# EAGLE board openSX70-dongle-USB-V1-1 (EAGLE 9.2.0)
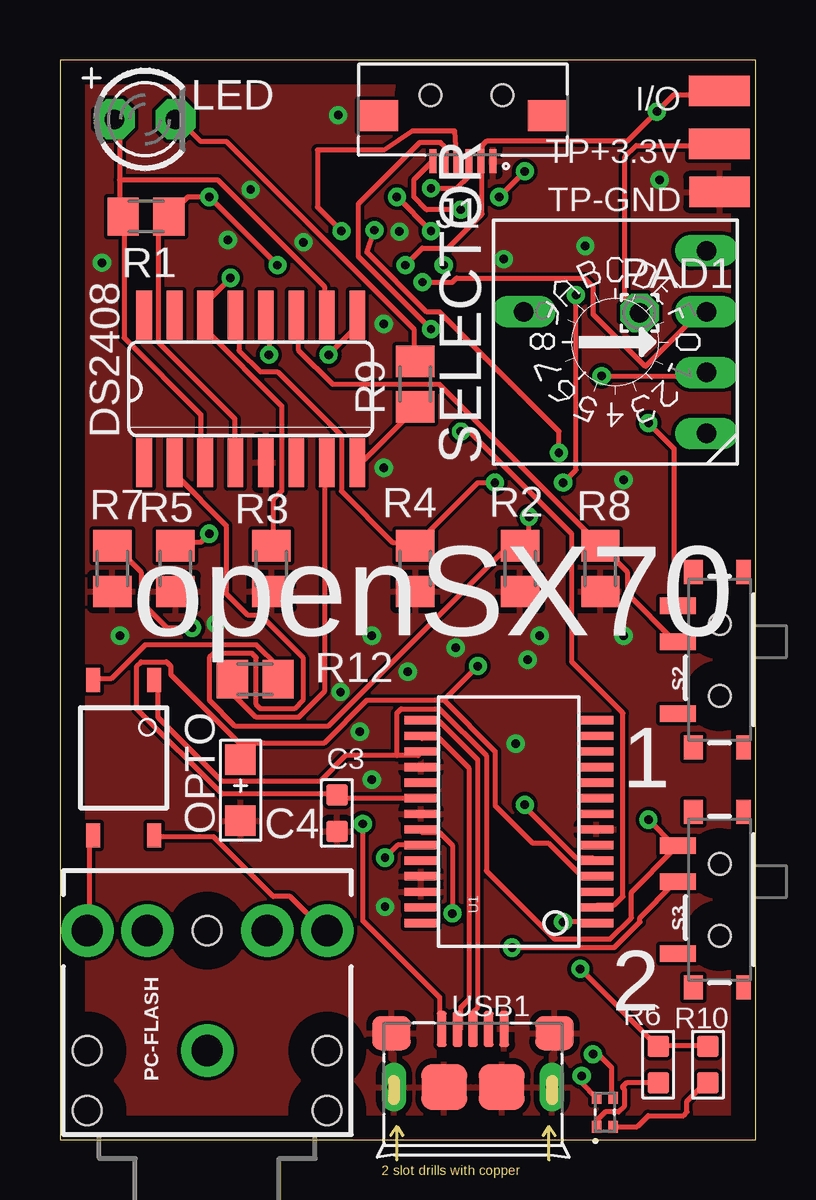
[diagram p0: board, top side]
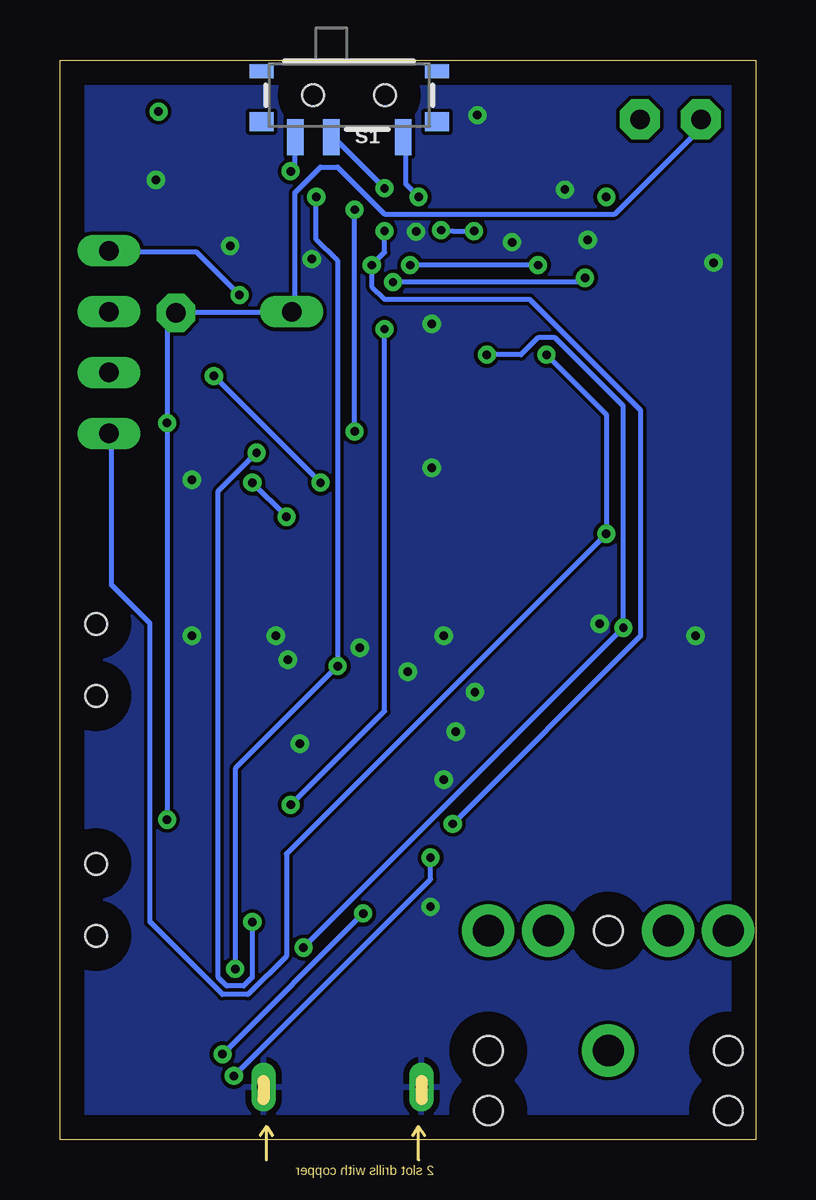
[diagram p1: board, bottom side, seen from below]

Size 29 x 45 mm. Coordinates in mm from the lower left corner, seen from the top.
Outline: 0,0 29,0 29,45 0,45 0,0
Copper layers (1*16): Top 0.035mm / dielectric 1.5mm / Bottom 0.035mm
Design rules "default": minimum track width 6mil, minimum drill 0.35mm, track to track 6mil, track to pad 6mil, pad to pad 6mil, via to via 6mil, smd to smd 6mil, copper to edge 40mil, drill to drill 6mil, minimum pad ring 10mil, minimum via ring 8mil, stop-mask expansion 4mil, vias tented up to drill 0mil, thermal gap 10mil
Net classes: 0 GND: width 0.203 mm; 1 power: width 0.203 mm; 2 2.8V: width 0.203 mm

## Footprints (pad centres in the part's own frame; a part is rotated, then mirrored left to right if it is on the bottom)
C0603 = smd 0.889 x 0.889: 1 0,0.762; 2 0,-0.762
AVX-A = smd 1.27 x 1.27: + -1.27,0; - 1.27,0
SO16 = smd 0.66 x 2.032: 1 -4.445,-3.073; 2 -3.175,-3.073; 3 -1.905,-3.073; 4 -0.635,-3.073; 5 0.635,-3.073; 6 1.905,-3.073; 7 3.175,-3.073; 8 4.445,-3.073; 9 4.445,3.073; 10 3.175,3.073; 11 1.905,3.073; 12 0.635,3.073; 13 -0.635,3.073; 14 -1.905,3.073; 15 -3.175,3.073; 16 -4.445,3.073
SMD1,27-2,54 = smd 1.27 x 2.54: 1 0,0
687106183722 = smd 0.3 x 1: 1 -1.25,1.9; 2 -0.75,1.9; 3 -0.25,1.9; 4 0.25,1.9; 5 0.75,1.9; 6 1.25,1.9 | smd 1.65 x 1.3: Z1 -3.525,0; Z2 3.525,0
LED3MM = drill 0.813 pad 1.676 octagon: A -1.27,0; K 1.27,0
SO-4 = smd 1 x 0.6: 1 -3.24,0.635; 2 -3.24,-1.905; 3 3.24,-1.905; 4 3.24,0.635
1,6/0,8 = drill 0.813 pad 1.6 octagon: 1 0,0
AUDIO-JACK = drill 1.3 pad 2.184: RING 5,5; RSH 5,2.5; SLEEVE 0,0; TIP 5,-5; TSH 5,-2.5 | hole 1.2: 0,5; -2.5,5; -2.5,-5; 0,-5; 5,0
M0805 = smd 1.3 x 1.6: 1 -0.95,0; 2 0.95,0
R0603 = smd 0.889 x 0.889: 1 0,0.762; 2 0,-0.762
SWITCH_SPST_SMD_A = smd 0.7 x 1.5: 1 -2.25,-1.75; 2 -0.75,-1.75; 3 2.25,-1.75 | smd 1 x 0.6: GND1 -3.65,1; GND3 3.65,1 | smd 1 x 0.8: GND2 -3.65,-1.1; GND4 3.65,-1.1 | hole 0.9: -1.5,0; 1.5,0
SW-C16 = drill 0.813 long: 1 -3.81,-3.81; 2 -1.27,-3.81; 4 1.27,-3.81; 8 3.81,-3.81; C 1.27,3.81
SSOP28DB = smd 0.348 x 1.397: 1 -4.225,-3.656; 2 -3.575,-3.656; 3 -2.925,-3.656; 4 -2.275,-3.656; 5 -1.625,-3.656; 6 -0.975,-3.656; 7 -0.325,-3.656; 8 0.325,-3.656; 9 0.975,-3.656; 10 1.625,-3.656; 11 2.275,-3.656; 12 2.925,-3.656; 13 3.575,-3.656; 14 4.225,-3.656; 15 4.225,3.656; 16 3.575,3.656; 17 2.925,3.656; 18 2.275,3.656; 19 1.625,3.656; 20 0.975,3.656; 21 0.325,3.656; 22 -0.325,3.656; 23 -0.975,3.656; 24 -1.625,3.656; 25 -2.275,3.656; 26 -2.925,3.656; 27 -3.575,3.656; 28 -4.225,3.656
LED_APHB1608SYKSURKC = smd 0.5 x 0.4: 1 -0.6,0.35; 2 0.6,0.35; 3 -0.6,-0.35; 4 0.6,-0.35
MICRO-USB5+6P-SMD-0.65-B = smd 0.4 x 1.5: 1 -1.3,-0.25; 2 -0.65,-0.25; 3 0,-0.25; 4 0.65,-0.25; 5 1.3,-0.25 | smd 1.6 x 1.4: S1 -3.4,-0.427; S6 3.4,-0.427 | drill 0.508 pad 1.016 long: S2 -3.3,-2.675; S5 3.3,-2.675 | smd 1.9 x 1.9: S3 -1.2,-2.675; S4 1.2,-2.675

## Placement (x,y rotation side)
C3  100nf  [C0603]  11.55,13.61 0 top
C4  10uf  [AVX-A]  7.53,14.56 270 top
DS2408  DS2408  [SO16]  7.95,31.29 0 top
I/O  [SMD1,27-2,54]  27.48,43.7 90 top
J1  687106183722  [687106183722]  16.8,42.68 180 top
LED  [LED3MM]  3.55,42.53 0 top
OPTO  TLP127  [SO-4]  3.29,15.91 270 top
PAD1  WIREPAD1,6/0,8  [1,6/0,8]  24.16,34.46 0 top
PC-FLASH  AUDIO_JACK_3.5MM_PTH  [AUDIO-JACK]  6.14,3.71 90 top
R1  4K7  [M0805]  3.59,38.47 180 top
R2  100K  [M0805]  19.18,23.8 270 top
R3  100K  [M0805]  8.82,23.8 90 top
R4  100K  [M0805]  14.82,23.8 90 top
R5  100K  [M0805]  4.82,23.8 90 top
R6  1K  [R0603]  24.94,3.12 180 top
R7  100K  [M0805]  2.18,23.8 270 top
R8  100K  [M0805]  22.53,23.8 270 top
R9  220R  [M0805]  14.82,31.49 90 top
R10  1K  [R0603]  27.02,3.12 180 top
R12  220R  [M0805]  8.14,19.18 0 top
S1  [SWITCH_SPST_SMD_A]  16.94,43.53 0 bottom
S2  [SWITCH_SPST_SMD_A]  27.5,20 270 top
S3  [SWITCH_SPST_SMD_A]  27.5,10 270 top
SELECTOR  [SW-C16]  23.15,33.24 90 top
TP+3.3V  [SMD1,27-2,54]  27.48,41.51 90 top
TP-GND  [SMD1,27-2,54]  27.5,39.5 90 top
U1  FT232RLSSOP  [SSOP28DB]  18.71,13.25 90 top
U$1  DUAL-LED-0603-BIS  [LED_APHB1608SYKSURKC]  22.72,1.14 90 top
USB1  10118193-0001LF  [MICRO-USB5+6P-SMD-0.65-B]  17.22,4.86 0 top

## Library data of the parts
C3 = openSX70_PATHFINDER_V5.5-SEEED_20180522; MPN: CC0603KRX7R9BB104
C4 = Seeed-Capacitor-2016; MPN: TAJA106K016RNJ
DS2408 = DS2408-joaco
I/O PAD1 TP+3.3V TP-GND = wirepad
J1 = openSX70_PATHFINDER_V5.5-SEEED_20180522; AVAILABILITY: Good; DESCRIPTION: CONN FFC BTM 6POS 0.5MM SMD R/A; MF: Wurth Electronics; MP: 687106183722; PACKAGE: None; PRICE: 1.21 USD
LED = adafruit
OPTO = openSX70
PC-FLASH = SparkFun-Connectors; PROD_ID: CONN-08774; SF_ID: PRT-08032
R1-R5 R7-R9 R12 = rcl; SPICEPREFIX: R
R6 R10 = openSX70_PATHFINDER_V5.5-SEEED_20180522; MPN: RC0603FR-071KL
S1-S3 = SparkFun-Switches; PROD_ID: SWCH-10651; SF_SKU: COM-10860
SELECTOR = special
U1 = SparkFun
U$1 = _openSX70
USB1 = Seeed-Connector -2016; MPN: 10118193-0001LF

## Nets
1W: DS2408.4 I/O.1 J1.2 R1.1
3V3OUT: DS2408.3 DS2408.10 LED.A OPTO.1 PAD1.1 R1.2 S2.1 S3.1 SELECTOR.C TP+3.3V.1 U1.17
5V: C3.1 C4.+ R6.2 R10.2 S1.1 U1.4 U1.20
5V-J1: J1.3 S1.2
CTS: U1.11
DTR: J1.6 U1.2
GND: C3.2 C4.- DS2408.5 J1.1 R2.2 R3.1 R4.1 R5.1 R7.2 R8.2 TP-GND.1 U1.7 U1.18 U1.21 U1.25 U1.26 USB1.5 USB1.S1 USB1.S2 USB1.S3 USB1.S4 USB1.S5 USB1.S6
N$2: LED.K R9.2
N$3: DS2408.2 R2.1 SELECTOR.8
N$4: DS2408.14 R3.2 SELECTOR.4
N$5: DS2408.13 R4.2 SELECTOR.2
N$6: DS2408.11 R8.1 S2.2
N$7: DS2408.9 R7.1 S3.2
N$8: DS2408.8 R9.1
N$9: R6.1 U$1.1
N$10: OPTO.2 R12.2
N$11: DS2408.7 R12.1
N$12: OPTO.4 PC-FLASH.TIP
N$13: DS2408.12 R5.2 SELECTOR.1
N$14: R10.1 U$1.3
N$15: OPTO.3 PC-FLASH.RING
N$16: U1.16 USB1.2
RXI: J1.5 U1.5
RXLED: U1.22 U$1.4
TXLED: U1.23 U$1.2
TXO: J1.4 U1.1
USB_D+: U1.15 USB1.3
VCC-USB: S1.3 USB1.1

## Tracks (layer width: path | path; a pad name or v marks a point on that pad's centre or on a via)
1W  (via drill 0.35)
  Top 0.203: DS2408.4 7.29,28.27 7.29,30.05 4.09,33.25 4.09,38.05 4.45,38.41 R1.1 4.62,38.58 5.33,39.29 v6.22,39.29 v9.07,36.45 | I/O.1 27.38,43.56 25.6,43.56 v24.89,42.85 23.65,41.6 17.78,41.6 17.6,41.43 17.6,40.89 J1.2 17.6,40.72 17.6,38.58 16.18,37.16 15.11,37.16 v14.4,36.45
  Bottom 0.203: v9.07,36.45 v14.4,36.45
3V3OUT  (via drill 0.35)
  Top 0.203: 14.05,16 14.94,16 U1.17 | 14.05,16 11.91,16 10.85,14.94 6.76,14.94 4.09,17.6 4.09,19.02 OPTO.1 | 14.05,16 14.05,17.78 14.22,17.96 15.82,17.96 17.78,16 17.78,11.2 20.62,8.36 22.94,8.36 23.82,9.25 23.82,10.31 25.6,12.09 S3.1 25.6,12.27 v24.54,13.34 | 2.49,40.01 2.49,42.32 2.31,42.49 LED.A | 2.49,40.01 2.49,38.58 R1.2 2.67,38.41 2.67,33.43 5.87,30.23 5.87,28.27 DS2408.3 | 2.49,40.01 6.58,40.01 11.02,35.56 11.02,34.49 DS2408.10 | v24.54,29.87 25.6,28.8 25.6,22.4 S2.1 | PAD1.1 23.54,35.08 23.54,40.94 24.03,41.43 27.38,41.43 TP+3.3V.1
  Bottom 0.203: LED.A 2.31,42.49 2.31,42.14 5.87,38.58 15.47,38.58 17.42,40.54 18.14,40.54 19.2,39.47 19.2,34.67 SELECTOR.C 19.38,34.49 24.16,34.49 PAD1.1 24.54,34.21 v24.54,29.87 v24.54,13.34
5V  (via drill 0.35)
  Top 0.203: R10.2 26.85,3.91 25.07,3.91 R6.2 24.89,3.91 v21.69,7.11 | U1.20 14.94,14.22 11.56,14.22 C3.1 11.38,14.4 6.76,14.4 3.2,17.96 3.2,19.74 3.38,19.91 4.45,19.91 4.62,19.74 4.62,19.38 7.47,16.54 | 7.47,16.54 7.47,16 C4.+ | 16,18.31 18.14,16.18 18.14,13.93 19.71,12.36 20.36,12.36 21.69,11.02 22.23,11.02 U1.4 | 16,18.31 12.8,18.31 11.02,16.54 7.47,16.54 | 16,18.31 v17.42,19.74 | v18.31,39.29 v19.38,40.36
  Bottom 0.203: v21.69,7.11 21.69,15.47 v17.42,19.74 17.42,36.63 18.31,37.52 v18.31,39.29 | v19.38,40.36 19.2,40.54 19.2,41.6 S1.1
5V-J1  (via drill 0.35)
  Top 0.203: v15.47,39.65 16.54,39.65 17.07,40.18 17.07,40.72 J1.3
  Bottom 0.203: v15.47,39.65 17.6,41.78 S1.2
DTR  (via drill 0.35)
  Top 0.203: v16.71,29.52 17.07,29.52 21.34,25.25 21.34,19.91 23.47,17.78 23.47,10.13 23.11,9.78 22.4,9.78 U1.2 | v16.71,38.76 15.29,38.76 14.76,39.29 14.76,40.01 15.47,40.72 J1.6
  Bottom 0.203: v16.71,29.52 v16.71,38.76
GND  (via drill 0.35)
  other vias: 25,40 14.15,37.85 10.15,37.4 13.5,34 13.5,28 7,37.5 23.5,27.5 12.5,17 13,21 20,21 14.5,19.5 6.5,21.5 2.5,21 16.5,20.5 19,16.5 13,15 19.5,20 11.7,18.65 11.6,42.7 18.5,36.7 1.75,36.55 13.55,9.7 23.5,21 21.9,37.25 7.95,39.6
  pour Top: 0,45 29,45 29,0 0,0
  pour Bottom: 0,45 29,45 29,0 0,0
N$2
  Top 0.203: R9.2 14.76,32.54 14.76,33.78 6.93,41.6 5.87,41.6 4.98,42.49 LED.K
N$3  (via drill 0.35)
  Top 0.203: DS2408.2 4.8,28.09 4.8,27.74 6.93,25.6 6.93,22.76 7.82,21.87 8.36,21.87 10.13,20.09 10.13,18.31 9.78,17.96 8.36,17.96 8.18,18.14 8.18,20.09 8,20.27 6.4,20.27 6.22,20.09 6.22,18.31 7.29,17.25 11.2,17.25 18.67,24.71 19.02,24.71 R2.1 19.2,24.89 19.56,25.25 v19.56,25.96 | v21.51,35.2 21.51,27.91 v20.98,27.38
  Bottom 0.203: v21.51,35.2 23.29,36.98 26.85,36.98 SELECTOR.8 | v19.56,25.96 v20.98,27.38
N$4  (via drill 0.35)
  Top 0.203: R3.2 8.89,24.89 8.89,26.67 9.25,27.03 9.25,30.58 6.04,33.78 6.04,34.31 DS2408.14 6.04,34.49 6.04,34.85 v7.11,35.92 | v15.11,35.74 16.36,35.74 16.54,35.92 21.87,35.92 22.23,35.56 22.23,34.4 24.41,32.22 26.68,34.49 26.85,34.49 SELECTOR.4
  Bottom 0.203: v15.11,35.74 7.29,35.74 v7.11,35.92
N$5  (via drill 0.35)
  Top 0.203: DS2408.13 7.47,34.31 7.47,32.89 8.36,32 9.07,32 11.73,29.34 11.73,27.03 13.87,24.89 14.76,24.89 R4.2 14.94,24.89 17.42,27.38 v18.14,27.38 | v22.58,31.83 26.85,31.83 SELECTOR.2
  Bottom 0.203: v18.14,27.38 v22.58,31.83
N$6
  Top 0.203: S2.2 25.6,20.8 23.65,22.76 23.65,23.65 22.58,24.71 R8.1 22.4,24.89 15.82,31.47 11.38,31.47 9.96,32.89 9.96,34.31 DS2408.11
N$7  (via drill 0.35)
  Top 0.203: v18.85,8 23.11,8 24.18,9.07 24.18,9.25 25.6,10.67 S3.2 | v5.51,21.34 4.45,21.34 3.38,22.4 3.38,23.65 2.31,24.71 R7.1 | v11.2,32.72 12.27,33.78 12.27,34.31 DS2408.9
  Bottom 0.203: v18.85,8 v5.51,21.34 5.51,30.58 8.36,33.43 9.07,33.43 9.78,32.72 v11.2,32.72
N$8
  Top 0.203: R9.1 14.76,30.4 12.45,28.09 DS2408.8
N$9
  Top 0.203: R6.1 23.61,2.36 23.45,2.2 23.45,2.17 23.52,2.1 23.52,1.39 23.29,1.15 22.73,1.15 22.37,0.79 U$1.1
N$10
  Top 0.203: OPTO.2 1.42,19.2 2.13,19.2 3.56,20.62 8.18,20.62 9.07,19.74 9.07,19.2 R12.2
N$11
  Top 0.203: R12.1 7.29,19.02 7.29,18.49 8.18,17.6 9.96,17.6 11.02,18.67 11.02,28.09 DS2408.7
N$12
  Top 0.203: OPTO.4 4.09,12.62 6.4,12.62 8.89,10.13 9.6,10.13 11.02,8.71 PC-FLASH.TIP
N$13  (via drill 0.35)
  Top 0.203: v6.22,25.25 5.87,24.89 4.98,24.89 R5.2 | v8.71,32.72 8.71,34.31 DS2408.12
  Bottom 0.203: v8.71,32.72 6.22,30.23 v6.22,25.25 19.56,11.91 19.56,7.64 21.16,6.04 22.23,6.04 25.25,9.07 25.25,21.51 26.85,23.11 26.85,29.34 SELECTOR.1
N$14
  Top 0.203: R10.1 26.85,2.31 26.14,1.6 26.14,1.14 26,1 24.53,1 24.07,0.54 U$1.3
N$15
  Top 0.203: OPTO.3 1.25,12.62 1.25,8.71 PC-FLASH.RING
N$16
  Top 0.203: U1.16 15.11,16.71 15.82,16.71 17.07,15.47 17.07,5.87 16.71,5.51 16.71,4.62 USB1.2
RXI  (via drill 0.35)
  Top 0.203: v19.38,13.95 19.38,13.87 21.51,11.73 22.23,11.73 U1.5 | v15.47,33.78 12.45,36.8 12.45,39.01 14.99,41.55 15.87,41.55 16,41.43 16,40.89 J1.5
  Bottom 0.203: v15.47,33.78 15.47,17.86 v19.38,13.95
RXLED  (via drill 0.35)
  Top 0.203: v16.36,9.42 16.36,12.27 15.82,12.8 15.11,12.8 U1.22 | U$1.4 23,1.81 23,3 22.44,3.56 v22.23,3.56
  Bottom 0.203: v16.36,9.42 v22.23,3.56
TXLED  (via drill 0.35)
  Top 0.203: U$1.2 21.75,2.36 v21.75,2.65 | U1.23 14.07,12.28 v13.55,11.75
  Bottom 0.203: v21.75,2.65 13.55,10.85 v13.55,11.75
TXO  (via drill 0.35)
  Top 0.203: v20.8,28.63 20.8,29.52 15.82,34.49 15.29,34.49 12.8,36.98 v13.11,37.91 | v20.98,9.07 22.23,9.07 U1.1 | v11.73,37.87 10.73,38.87 10.73,41.25 13.5,41.25 14.68,42.03 16.47,42.03 J1.4
  Bottom 0.203: v20.8,28.63 22.4,27.03 22.4,6.76 22.05,6.4 21.34,6.4 20.98,6.76 v20.98,9.07 | v11.73,37.87 12.62,37.87 v13.11,37.91
USB_D+
  Top 0.203: U1.15 15.11,17.42 15.82,17.42 17.42,15.82 17.42,5.51 17.25,5.33 17.25,4.62 USB1.3
VCC-USB  (via drill 0.35)
  Top 0.203: v12.62,13.16 12.62,9.13 15.82,5.93 15.82,4.62 USB1.1 | v15.47,37.87 v14.05,39.29
  Bottom 0.203: v12.62,13.16 4.8,20.98 4.8,30.4 9.42,35.03 15.47,35.03 16,35.56 v16,36.45 15.47,36.98 v15.47,37.87 | v14.05,39.29 14.58,39.83 14.58,41.6 S1.3

## Text on the board
tPlace: openSX70 | 1 | 2